# EAGLE board untitled3 (EAGLE 7.6.0)
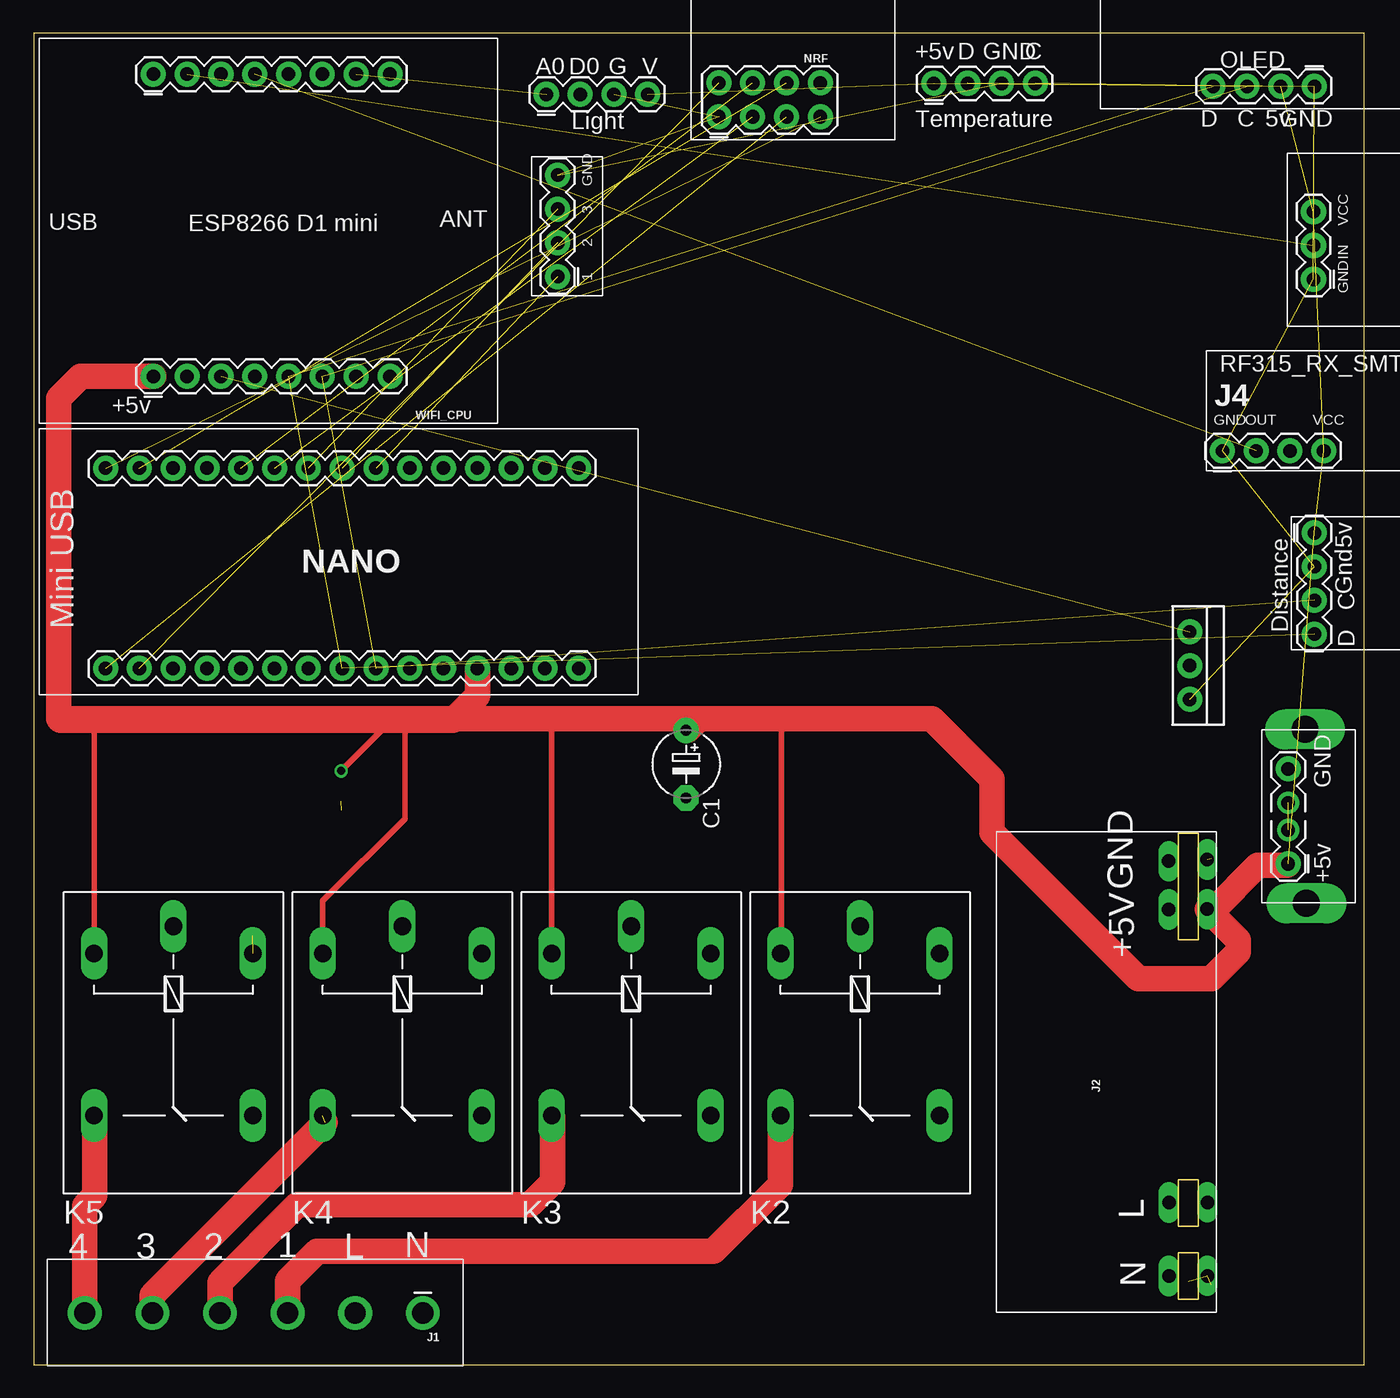
[diagram p0: board, top side]
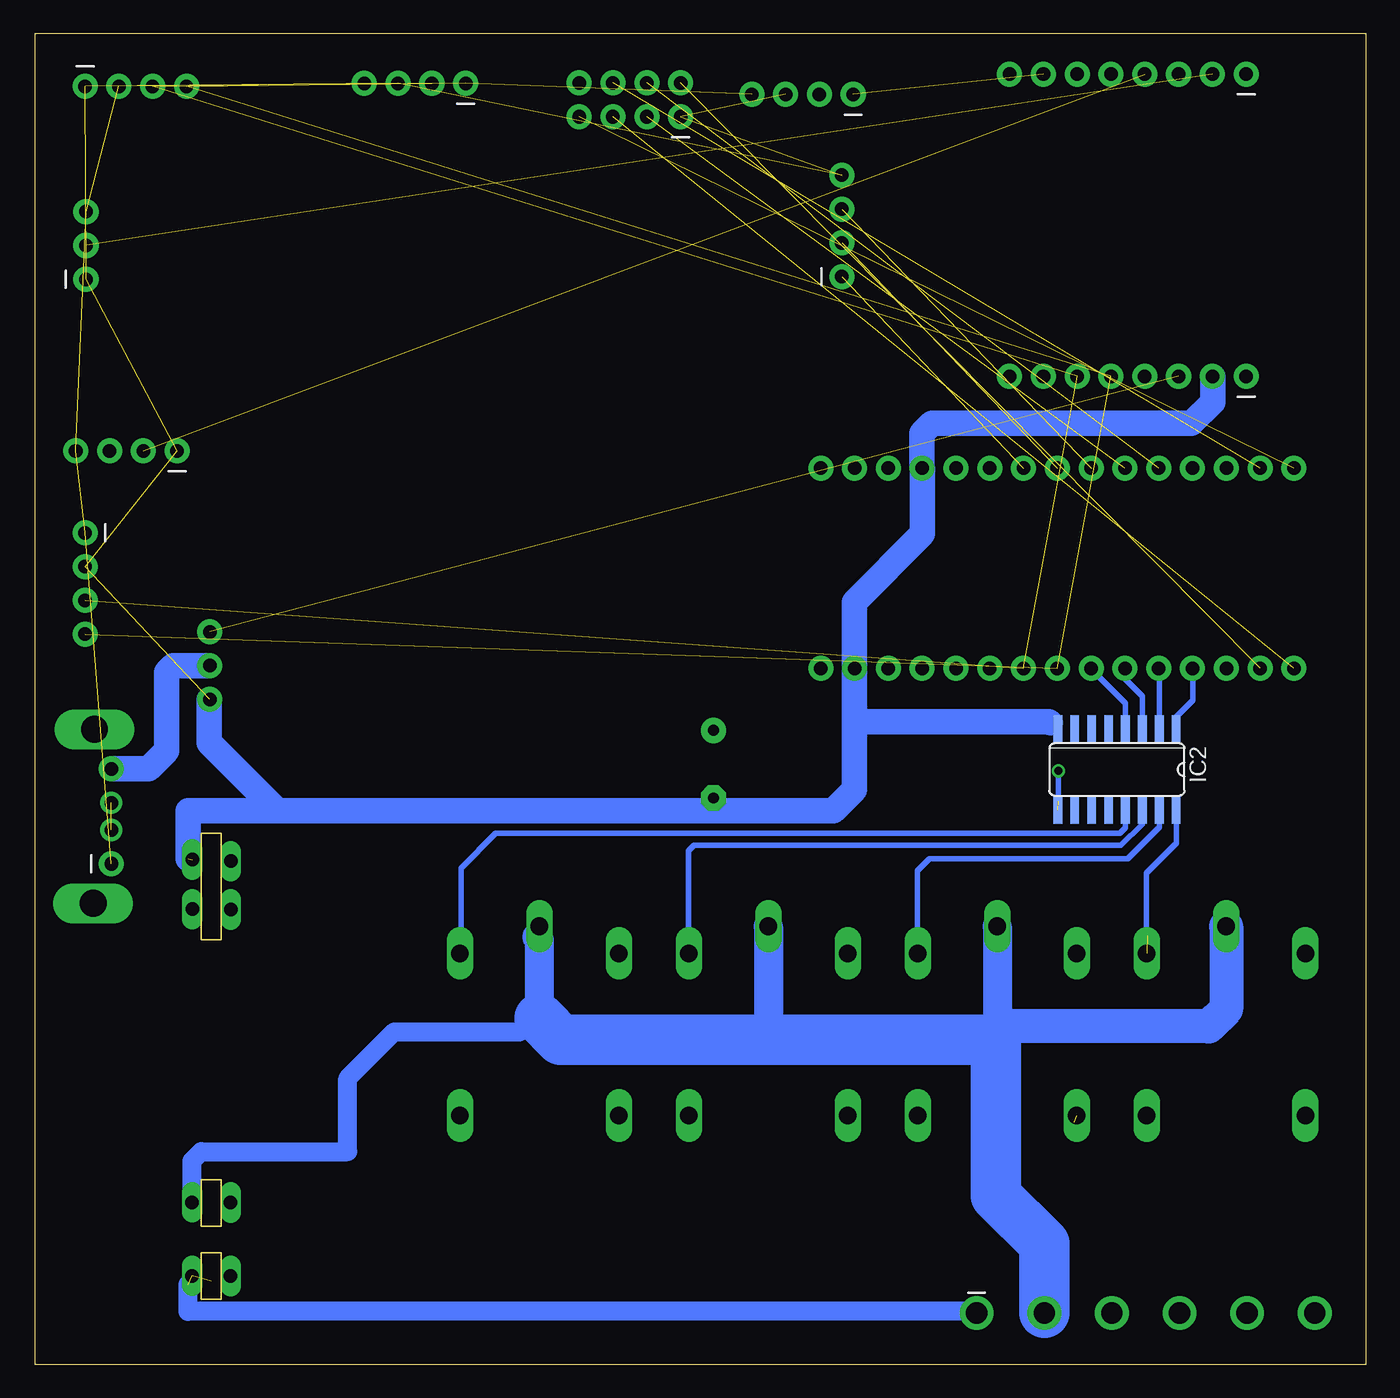
[diagram p1: board, bottom side, seen from below]

Size 100 x 100 mm. Coordinates in mm from the lower left corner, seen from the top.
Outline: 0,0 100,0 100,100 0,100 0,0
Copper layers (1*16): Top 0.035mm / dielectric 1.5mm / Bottom 0.035mm
Design rules "default *": minimum track width 15mil, minimum drill 24mil, track to track 15mil, track to pad 15mil, pad to pad 15mil, via to via 10mil, smd to smd 10mil, copper to edge 40mil, drill to drill 8mil, minimum pad ring 10mil, minimum via ring 8mil, stop-mask expansion 4mil, vias tented up to drill 0mil, thermal gap 10mil

## Footprints (pad centres in the part's own frame; a part is rotated, then mirrored left to right if it is on the bottom)
BUZZ_MODULE = drill 1.016 pad 1.88: 1 3.52,-1.97; 3 6.06,-1.97; 5 8.6,-1.97
E5-5 = drill 0.813 pad 1.905: + -2.54,0 | drill 0.813 pad 1.905 octagon: - 2.54,0
IIC_DISTANCE = drill 1.016 pad 1.88: 1 -3.78,1.73; 2 -1.24,1.73; 3 1.3,1.73; 4 3.84,1.73
SO16 = smd 0.66 x 2.032: 1 -4.445,-3.073; 2 -3.175,-3.073; 3 -1.905,-3.073; 4 -0.635,-3.073; 5 0.635,-3.073; 6 1.905,-3.073; 7 3.175,-3.073; 8 4.445,-3.073; 9 4.445,3.073; 10 3.175,3.073; 11 1.905,3.073; 12 0.635,3.073; 13 -0.635,3.073; 14 -1.905,3.073; 15 -3.175,3.073; 16 -4.445,3.073
OUT_HEAD_6_AC_4CH = drill 1.6 pad 2.54: 1 -7.14,0.22; 2 -2.06,0.22; 3 3.02,0.22; 4 8.1,0.22; 5 13.18,0.22; 6 18.26,0.22
AC_DC_SIDE_2A = drill 1.016 pad 1.27 long: 1 -27.71,-0.7; 2 -33.23,-0.7; 3 -5.69,-0.68; 4 -1.97,-0.68; 5 -27.73,2.2; 6 -33.25,2.2; 7 -5.71,2.22; 8 -2.09,2.22
SELECT_1_IN_3 = drill 1.016 pad 1.88: 1 -3.98,2.03; 2 -1.44,2.03; 3 1.1,2.03; 4 3.64,2.03
315MHZ_RX_SMT_LONG = drill 1.016 pad 1.88: 1 1.32,1.64; 2 3.86,1.64; 3 6.4,1.64; 4 8.94,1.64
USB_V_OUT = drill 1.016 pad 1.88: 1 2.92,1.53; 4 10.04,1.53 | drill 1.016 pad 1.676: 2 5.46,1.53; 3 7.5,1.53 | drill 2 pad 2.184 long: P$1 -0.05,0.17; P$2 13.02,0.27
G5LE = drill 1.321 long: 1 -7.493,-5.969; 2 -7.493,5.969; O 4.699,5.969; P -9.525,0; S 4.699,-5.969
LIGHT_DEC = drill 1.016 pad 1.88: 1 -3.68,2.03; 2 -1.14,2.03; 3 1.4,2.03; 4 3.94,2.03
ARDUINO_NANO = drill 1.016 pad 1.88: 1 -10.2,-8.1; 2 -7.66,-8.1; 3 -5.12,-8.1; 4 -2.58,-8.1; 5 -0.04,-8.1; 6 2.5,-8.1; 7 5.04,-8.1; 8 7.58,-8.1; 9 10.12,-8.1; 10 12.66,-8.1; 11 15.2,-8.1; 12 17.74,-8.1; 13 20.28,-8.1; 14 22.82,-8.1; 15 25.36,-8.1; 16 -10.2,6.93; 17 -7.66,6.93; 18 -5.12,6.93; 19 -2.58,6.93; 20 -0.04,6.93; 21 2.5,6.93; 22 5.04,6.93; 23 7.58,6.93; 24 10.12,6.93; 25 12.66,6.93; 26 15.2,6.93; 27 17.74,6.93; 28 20.28,6.93; 29 22.82,6.93; 30 25.36,6.93
NRF24L01 = drill 1.016 pad 1.88: 1 -13.21,1.73; 2 -13.21,4.27; 3 -10.67,1.73; 4 -10.67,4.27; 5 -8.13,1.73; 6 -8.13,4.27; 7 -5.59,1.73; 8 -5.59,4.27
IIC_OLED = drill 1.016 pad 1.88: 1 -3.78,-1.67; 2 -1.24,-1.67; 3 1.3,-1.67; 4 3.84,-1.67
IIC_TEMPERATURE = drill 1.016 pad 1.88: 1 -3.68,2.03; 2 -1.14,2.03; 3 1.4,2.03; 4 3.94,2.03
MOS_IRF520 = drill 1.016 pad 1.88: 1 -3.68,2.03; 2 -1.14,2.03; 3 1.4,2.03
ESP8266_MINI = drill 1.016 pad 1.88: 1 -10.61,1.53; 2 -8.07,1.53; 3 -5.53,1.53; 4 -2.99,1.53; 5 -0.45,1.53; 6 2.09,1.53; 7 4.63,1.53; 8 7.17,1.53; 9 -10.61,24.23; 10 -8.07,24.23; 11 -5.53,24.23; 12 -2.99,24.23; 13 -0.45,24.23; 14 2.09,24.23; 15 4.63,24.23; 16 7.17,24.23

## Placement (x,y rotation side)
BUZZ  [BUZZ_MODULE]  94.2,78 90 top
C1  [E5-5]  49.02,45.1 270 top
DISTANCE  [IIC_DISTANCE]  94.5,58.7 270 top
IC2  ULN2003AD  [SO16]  18.7,44.7 180 bottom
J1  [OUT_HEAD_6_AC_4CH]  22.1,4.1 180 top
J2  [AC_DC_SIDE_2A]  87.5,39.9 90 top
J3  [SELECT_1_IN_3]  41.4,85.7 90 top
J4  [315MHZ_RX_SMT_LONG]  88,67 0 top
K1  [USB_V_OUT]  95.8,34.7 90 top
K2  G5L  [G5LE]  62.1,23.4 270 top
K3  G5L  [G5LE]  44.9,23.4 270 top
K4  G5L  [G5LE]  27.7,23.4 270 top
K5  G5L  [G5LE]  10.5,23.4 270 top
LIGHT  [LIGHT_DEC]  42.2,93.38 0 top
NANO  [ARDUINO_NANO]  15.6,60.4 0 top
NRF  [NRF24L01]  64.7,92 0 top
OLED  [IIC_OLED]  92.46,94.34 180 top
TEMPERATURE  [IIC_TEMPERATURE]  71.32,94.2 0 top
USB_CHARGE_MOS  [MOS_IRF520]  84.84,51.36 270 top
WIFI_CPU  [ESP8266_MINI]  19.6,72.7 0 top

## Library data of the parts
BUZZ DISTANCE J1-J4 K1 LIGHT NANO NRF OLED TEMPERATURE USB_CHARGE_MOS WIFI_CPU = rx
C1 = resistor
IC2 = uln-udn
K2-K5 = relay; OC_FARNELL: unknown; OC_NEWARK: unknown

## Nets
3V3: WIFI_CPU.9
+5V: BUZZ.5 C1.+ DISTANCE.1 IC2.9 J2.3 J4.4 K1.1 K2.1 K3.1 K4.1 K5.1 LIGHT.4 NANO.12 OLED.2 TEMPERATURE.1 WIFI_CPU.1
A0: LIGHT.1 WIFI_CPU.15
D0: WIFI_CPU.14
D3: WIFI_CPU.4
D4: USB_CHARGE_MOS.1 WIFI_CPU.3
D5: WIFI_CPU.13
D6: J4.2 WIFI_CPU.12
D7: WIFI_CPU.11
D8: BUZZ.3 WIFI_CPU.10
GND: BUZZ.1 C1.- DISTANCE.2 IC2.8 J2.4 J3.4 J4.1 LIGHT.3 NANO.14 NANO.27 NRF.1 OLED.1 TEMPERATURE.3 USB_CHARGE_MOS.3 WIFI_CPU.2
IIC_C: DISTANCE.3 NANO.9 OLED.3 TEMPERATURE.4 WIFI_CPU.6
IIC_D: DISTANCE.4 NANO.8 OLED.4 TEMPERATURE.2 WIFI_CPU.5
L: J1.2 J2.1 K2.P K3.P K4.P K5.P
MOS_OUT: K1.4 USB_CHARGE_MOS.2
N: J1.1 J2.2
N$1: NRF.8
N$2: K1.2 K1.3
N$3: LIGHT.2
NANO_3V3: NANO.2 NRF.2
NANO_A0: IC2.1 NANO.4
NANO_A1: IC2.2 NANO.5
NANO_A2: IC2.3 NANO.6
NANO_A3: IC2.4 NANO.7
NANO_A6: NANO.10
NANO_A7: NANO.11
NANO_AREF: NANO.3
NANO_D2: NANO.26
NANO_D3: NANO.25
NANO_D4: J3.1 NANO.24
NANO_D5: J3.2 NANO.23
NANO_D6: J3.3 NANO.22
NANO_D7: NANO.21 NRF.3
NANO_D8: NANO.20 NRF.4
NANO_D9: NANO.19
NANO_D10: NANO.18
NANO_D11: NANO.17 NRF.6
NANO_D12: NANO.16 NRF.7
NANO_D13: NANO.1 NRF.5
NANO_RST: NANO.13
NANO_RST2: NANO.28
NANO_RX: NANO.29
NANO_TX: NANO.30
NANO_VIN: NANO.15
OUT1: J1.3 K2.S
OUT2: J1.4 K3.S
OUT3: J1.5 K4.S
OUT4: J1.6 K5.S
RST: WIFI_CPU.16
RX: WIFI_CPU.7
TX: WIFI_CPU.8
ULN_O1: IC2.16 K5.2
ULN_O2: IC2.15 K4.2
ULN_O3: IC2.14 K3.2
ULN_O4: IC2.13 K2.2

## Tracks (layer width: path | path; a pad name or v marks a point on that pad's centre or on a via)
+5V  (via drill 0.6)  (7 unrouted)
  Top 0.406: v23.1,44.6 26.9,48.4 28.4,48.4 27.9,47.9 27.9,41 21.73,34.83 K4.1 | K5.1 4.53,47.87 4,48.4 | K3.1 38.93,48.07 38.5,48.5 | K2.1 56.19,30.89 56.2,30.9 56.2,48.4 56.3,48.5
  Top 1.93: 1.9,48.5 1.9,72.6 3.53,74.23 WIFI_CPU.1 v9,74.24 | NANO.12 33.34,50.24 31.5,48.4 28.4,48.4 4,48.4 2,48.4 1.9,48.5 | 1.9,48.5 38.5,48.5 50,48.5 | 50,48.5 56.3,48.5 67.5,48.5 72,44 72,40 83,29 88.5,29 90.5,31 90.5,31.89 J2.3 88.72,34.22 92,37.5 94.15,37.5 K1.1 | C1.+ 49.14,47.64 50,48.5
  Bottom 0.406: v23.1,44.6 23.1,42.3
A0  (1 unrouted)
D4  (1 unrouted)
D6  (1 unrouted)
D8  (1 unrouted)
GND  (9 unrouted)
  Bottom 0.406: IC2.8 23.67,47.77 24.2,48.3
  Bottom 1.93: 38.42,48.5 NANO.14 38.42,57.28 33.3,62.4 33.3,67.29 NANO.27 33.34,69.96 32.6,70.7 13.1,70.7 11.5,72.3 11.5,74.2 WIFI_CPU.2 | 38.42,48.5 38.42,43.18 40,41.6 49,41.6 | 49,41.6 81.8,41.6 | 38.42,48.5 38.22,48.3 24.2,48.3 23.8,48.3 23.7,48.2 | 81.8,41.6 86.9,46.7 86.9,49.93 USB_CHARGE_MOS.3 | C1.- 49.02,41.62 49,41.6 | 81.8,41.6 88.5,41.6 88.5,38
IIC_C  (4 unrouted)
IIC_D  (4 unrouted)
L
  Bottom 1.422: 62.4,26.4 62.1,26.7 | J2.1 88.2,15.3 87.5,16 76.5,16 76.5,21.5 73,25 63.6,25 62.1,26.5 | K2.P 62.1,31
  Bottom 2.184: 62.1,26 62.1,26.5 62.1,26.7 62.1,31 62.1,31.9 62.3,32.1 | K3.P 44.9,24.8 44.5,24.4 | K4.P 27.7,25.3 27.7,24.3 27.8,24.2
  Bottom 2.54: K5.P 10.5,26.7 11.8,25.4 27.6,25.4 27.7,25.3
  Bottom 3.81: J1.2 24.16,9.06 27.8,12.7 27.8,24.2 27.8,24.4 44.5,24.4 60.5,24.4 62.1,26
MOS_OUT
  Bottom 1.93: K1.4 91.46,44.74 90.1,46.1 90.1,52 89.6,52.5 USB_CHARGE_MOS.2
N  (2 unrouted)
  Bottom 1.422: J1.1 29.36,4 88.5,4 88.5,6
N$2  (1 unrouted)
NANO_3V3  (1 unrouted)
NANO_A0
  Bottom 0.406: IC2.1 14.26,48.65 13,49.9 13,52.28 NANO.4
NANO_A1
  Bottom 0.406: IC2.2 15.53,52.27 NANO.5
NANO_A2
  Bottom 0.406: IC2.3 16.8,50.2 18.1,51.5 NANO.6
NANO_A3
  Bottom 0.406: NANO.7 20.64,52.24 18.07,49.66 IC2.4
NANO_D4  (1 unrouted)
NANO_D5  (1 unrouted)
NANO_D6  (1 unrouted)
NANO_D7  (1 unrouted)
NANO_D8  (1 unrouted)
NANO_D11  (1 unrouted)
NANO_D12  (1 unrouted)
NANO_D13  (1 unrouted)
OUT1
  Top 1.93: J1.3 19.08,6.28 21.3,8.5 51.1,8.5 56.1,13.5 56.1,18.67 K2.S
OUT2
  Top 1.93: J1.4 14,6.2 19.8,12 37.3,12 39,13.7 39,18.63 K3.S
OUT3  (1 unrouted)
  Top 1.93: J1.5 8.92,5.22 21.9,18.2
OUT4
  Top 1.93: J1.6 3.84,11.94 4.6,12.7 4.6,18.63 K5.S
ULN_O1  (1 unrouted)
  Bottom 0.406: IC2.16 14.26,39.15 16.5,36.9 16.5,32.3 16.4,32.2
ULN_O2
  Bottom 0.406: IC2.15 15.53,40.38 17.9,38 32.8,38 33.7,37.1 33.7,30.92 K4.2
ULN_O3
  Bottom 0.406: IC2.14 16.8,40.6 18.4,39 50.5,39 50.9,38.6 50.9,30.92 K3.2
ULN_O4
  Bottom 0.406: IC2.13 18.07,40.34 18.5,39.9 65.4,39.9 68,37.3 68,30.96 K2.2